# Altium PCB pcb.PcbDoc
Units mil, origin at the board's own origin, x right, y up, seen from the top; angles counter-clockwise.
Board outline 3051.18 x 787.4 mil, 2 copper layers (Top Layer, Bottom Layer); 39 components, 44 nets, 167 pads, 12 vias.
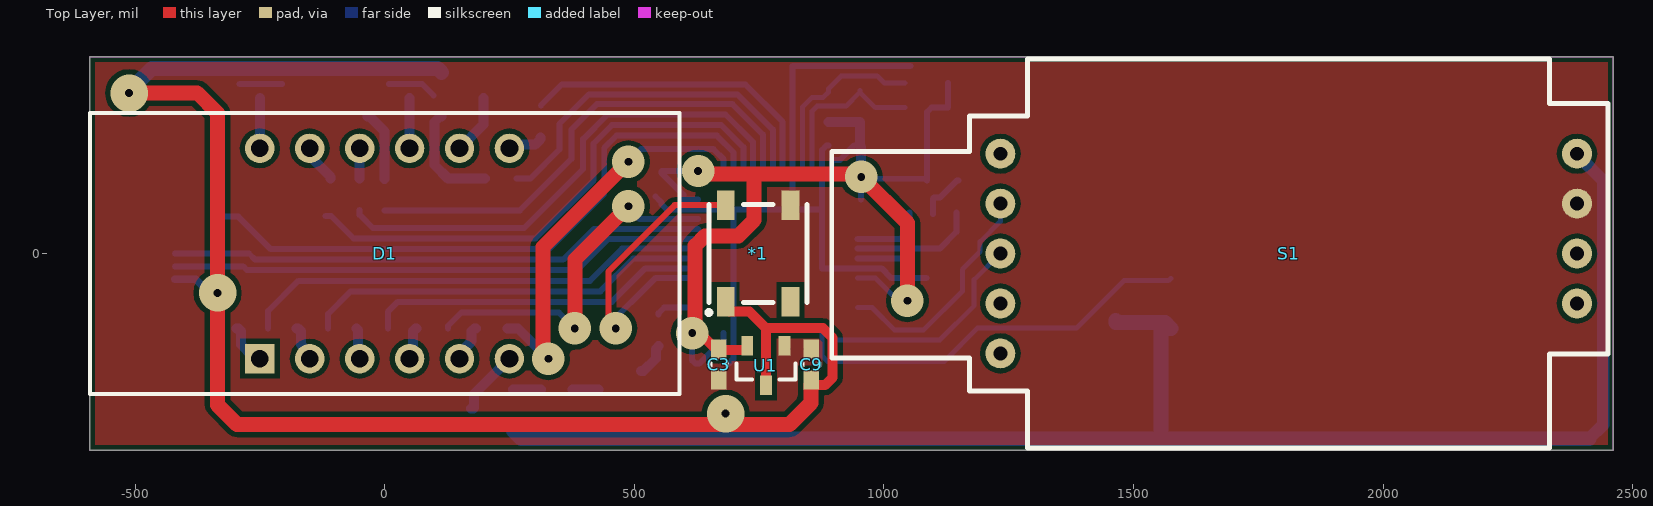
[diagram p0: Top Layer view]
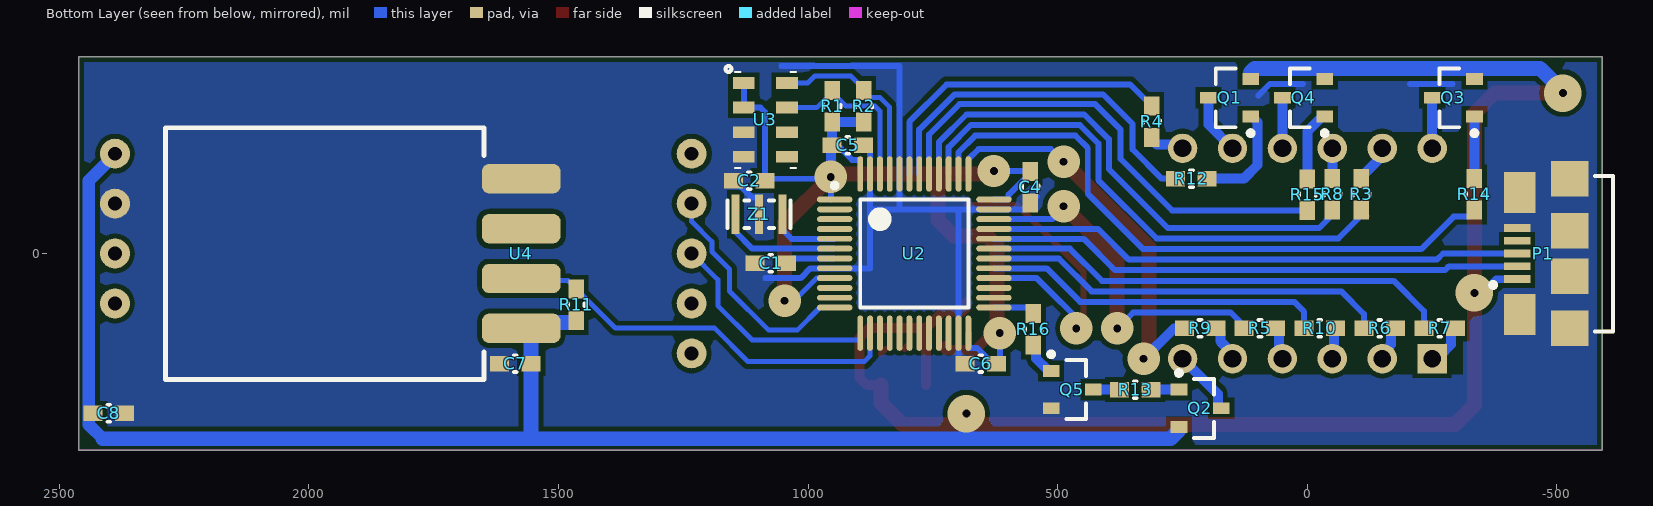
[diagram p1: Bottom Layer view, seen from below]
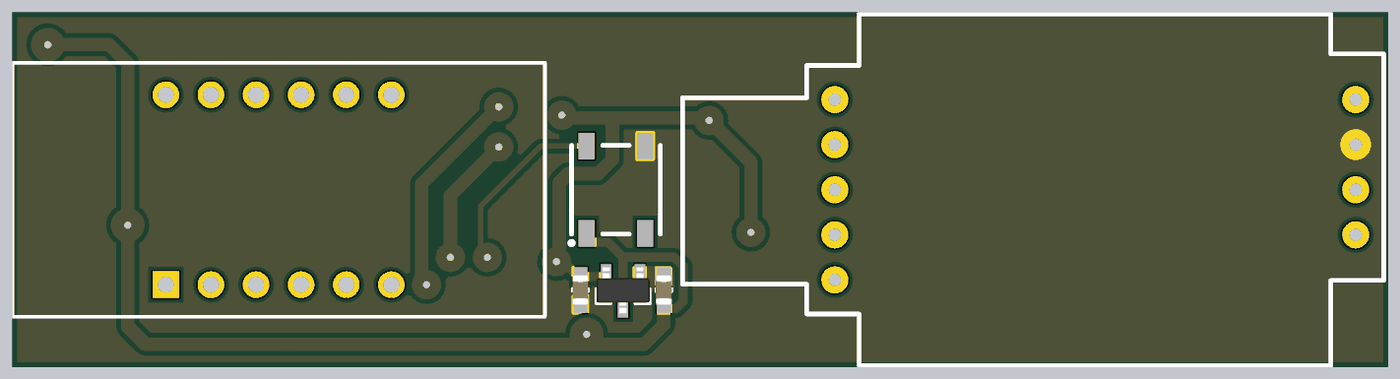
[diagram p2: 3D render of the assembled board from above, using the file's embedded part models]
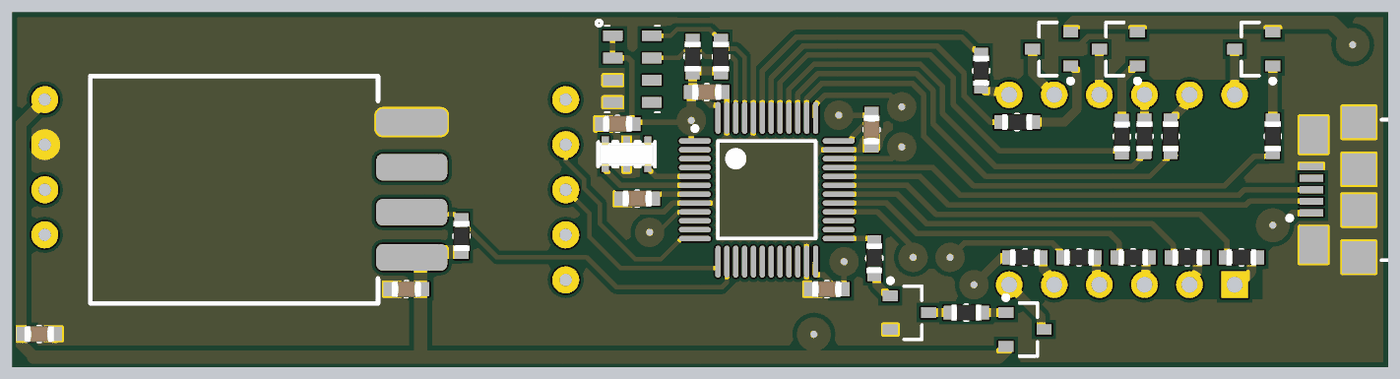
[diagram p3: 3D render of the assembled board from below, using the file's embedded part models]

## Layer stack, top to bottom
Top Solder: solder mask 0.4, Solder Resist, Dk 3.5
Top Layer: signal copper 1.4
Dielectric 1: dielectric 12.6, FR-4, Dk 4.8
Bottom Layer: signal copper 1.4
Bottom Solder: solder mask 0.4, Solder Resist, Dk 3.5

## Board outline
-590.55,-393.7 -590.55,393.7 2460.63,393.7 2460.63,-393.7

## Design rules (kind name [scope] priority, off if disabled: settings)
Clearance [All] p1: gap=5 ignorepadtopadclearanceinfootprint=FALSE except(10: Arc-Fill Arc-Poly Arc-Region Track-Fill Track-Poly Track-Region SMDPad-Fill SMDPad-Poly SMDPad-Region THPad-Fill THPad-Poly THPad-Region Via-Fill Via-Poly Via-Region Fill-Fill Fill-Poly Fill-Region Poly-Poly Poly-Region Region-Region)
MinimumSolderMaskSliver [All] p1 off: minsoldermaskwidth=10
PolygonConnect [All] p1: connectstyle=Direct reliefconductorwidth=10 reliefentries=4 polygonreliefangle="90 Angle" airgapwidth=10
RoutingVias [All] p1: holewidth=28 width=50 viastyle="Through Hole" minholewidth=15.75 minwidth=39.37 maxholewidth=28 maxwidth=196.85
SilkToSolderMaskClearance [IsPad] p1 off: minsilkscreentomaskgap=10 clearancetoexposedcopper=TRUE
SolderMaskExpansion [All] p1: expansion=4
Width [All] p1: maxlimit=500 minlimit=7.5 preferedwidth=10
28 further rules are at their usual default settings.

## Components (designator, comment, footprint, x,y, rotation, side; value= is the part's Value field where it differs from the comment)
*1 "LED_WS2812B" LED_WS2812b 748.03,0 r90 top
C1 "100nF" RC_0603 1074.8,-19.68 r180 bottom
C2 "100nF" RC_0603 1118.11,146.06 r180 bottom
C3 "100nF" RC_0603 669.29,-222.28 r90 top
C4 "100nF" RC_0603 555.12,133.18 r90 bottom
C5 "100nF" RC_0603 920.58,216.54 r0 bottom
C6 "100nF" RC_0603 654.22,-220.47 r180 bottom
C7 "100nF" RC_0603 1586.61,-220.47 r180 bottom
C8 "100nF" RC_0603 2401,-320 r0 bottom
C9 "100nF" RC_0603 854.33,-222.28 r270 top
D1 "7SEGx4" 7SEG_4X_MEDIUM 0,0 r0 top
P1 "USB" RR_USB_MICRO_#1 -393.7,0 r180 bottom
Q1 "PNP" SOT-23B_L 156,312 r0 bottom
Q2 "PNP" SOT-23B_L 215,-310.04 r180 bottom
Q3 "PNP" SOT-23B_L -292.32,312 r0 bottom
Q4 "PNP" SOT-23B_L 7.68,312 r0 bottom
Q5 "NPN_SOT23" SOT-23B_L 471,-272.64 r180 bottom
R1 "2k2" RR_0603 952.08,295.28 r270 bottom
R2 "2k2" RR_0603 889.08,295.28 r270 bottom
R3 "220" RR_0603 -108,118.5 r90 bottom
R4 "220" RR_0603 312,264 r270 bottom
R5 "220" RR_0603 95,-150 r180 bottom
R6 "220" RR_0603 -145,-150 r180 bottom
R7 "220" RR_0603 -265,-150 r180 bottom
R8 "220" RR_0603 -50,118.5 r90 bottom
R9 "220" RR_0603 215,-150 r180 bottom
R10 "220" RR_0603 -25,-150 r180 bottom
R11 "2k2" RR_0603 1464.57,-102.76 r270 bottom
R12 "1k" RR_0603 232.28,150 r180 bottom
R13 "1k" RR_0603 345,-272.64 r180 bottom
R14 "1k" RR_0603 -334.65,118.5 r90 bottom
R15 "1k" RR_0603 0,118.11 r90 bottom
R16 "1k" RR_0603 549,-152 r270 bottom
S1 "MH-Z19B" MH_Z19B 1811.02,0 r180 top locked
U1 "3V3_STAB" RR_SOT-23 763.78,-224.41 r270 top value="MOSFET N-CH 20V 4.2A SOT-23-3"
U2 "STM32F302C8T6" LQFP48_N 787.4,0 r180 bottom
U3 "Pressure Sensor" MS5611-01BA03 1085.63,267.72 r180 bottom
U4 "DHT11" DHT11 1968.5,0 r0 bottom
Z1 "8MHz" RR_CRYSTAL_3.2X1.3 1098.43,78.74 r180 bottom value="CER RES 8.0000MHZ 33PF SMD"

## Footprints (in the part's own frame and the unit in brackets; to place one, negate y for a bottom-side part, rotate by r counter-clockwise, add the part's x,y. Pads: shape width x height; smd on the part's side, far side on the other; paste and mask are expansions set on the pad)
7SEG_4X_MEDIUM [mm] "LED, 7-Segment Display, 9.2 mm, Dual Digit; 10 Leads; Row Space 10.7 mm; Pitch 2.54 mm"
  rect 1.5x1.5 hole 0.9: 1(-6.35,-5.35)
  round 1.5 hole 0.9: 2(-3.81,-5.35) 3(-1.27,-5.35) 4(1.27,-5.35) 5(3.81,-5.35) 6(6.35,-5.35) 7(6.35,5.35) 8(3.81,5.35) 9(1.27,5.35) 10(-1.27,5.35) 11(-3.81,5.35) 12(-6.35,5.35)
  silkscreen extent -15,-7.15 15,7.15, body extent -15,-7.15 15,7.15, height 7.1
DHT11 [mm]
  rrect50% 4x1.5 smd: 1(-10,3.81) 2(-10,1.27) 3(-10,-1.27) 4(-10,-3.81)
  silkscreen extent -8.1,-6.4 8.1,6.4, body extent -8.1,-6.4 8.1,6.4, height 6.1
LED_WS2812b [mm]
  rect 1.5x0.9 smd: 1(-2.46,1.65) 2(-2.46,-1.65) 3(2.46,-1.65) 4(2.46,1.65)
  silkscreen extent -3.1,-2.5 2.5,2.6, body extent -2.5,-2.5 2.5,2.5, height 1.6
LQFP48_N [mm] "Thin QFP, 48-Leads, Body 7x7mm, Pitch 0.5mm, IPC Medium Density"
  oval 1.8x0.3 smd: 1(-4.05,2.75) 2(-4.05,2.25) 3(-4.05,1.75) 4(-4.05,1.25) 5(-4.05,0.75) 6(-4.05,0.25) 7(-4.05,-0.25) 8(-4.05,-0.75) 9(-4.05,-1.25) 10(-4.05,-1.75) 11(-4.05,-2.25) 12(-4.05,-2.75) 25(4.05,-2.75) 26(4.05,-2.25) 27(4.05,-1.75) 28(4.05,-1.25) 29(4.05,-0.75) 30(4.05,-0.25) 31(4.05,0.25) 32(4.05,0.75) 33(4.05,1.25) 34(4.05,1.75) 35(4.05,2.25) 36(4.05,2.75)
  oval 0.3x1.8 smd: 13(-2.75,-4.05) 14(-2.25,-4.05) 15(-1.75,-4.05) 16(-1.25,-4.05) 17(-0.75,-4.05) 18(-0.25,-4.05) 19(0.25,-4.05) 20(0.75,-4.05) 21(1.25,-4.05) 22(1.75,-4.05) 23(2.25,-4.05) 24(2.75,-4.05) 37(2.75,4.05) 38(2.25,4.05) 39(1.75,4.05) 40(1.25,4.05) 41(0.75,4.05) 42(0.25,4.05) 43(-0.25,4.05) 44(-0.75,4.05) 45(-1.25,4.05) 46(-1.75,4.05) 47(-2.25,4.05) 48(-2.75,4.05)
  silkscreen extent -4.18,-2.75 2.75,3.57, body extent -3.5,-3.5 3.5,3.5, height 1.6
MH_Z19B [mil]
  round 60 hole 27.56: 1(-577.56,100) 2(-577.56,0) 3(-577.56,-100) 4(-577.56,-200) 5(577.56,-200) 6(577.56,-100) 7(577.56,0) 8(577.56,100) 9(577.56,200)
  silkscreen extent -640,-390 915,390, body extent -524,-390 524,390, height 354
MS5611-01BA03 [mm] "MS5611-01BA03 Pressure Sensor"
  rect 1.1x0.6 smd mask+0.1: 1(-1.1,1.875) 2(-1.1,0.625) 3(-1.1,-0.625) 4(-1.1,-1.875) 5(1.1,-1.875) 6(1.1,-0.625) 7(1.1,0.625) 8(1.1,1.875)
  silkscreen extent -2.03,-2.44 1.55,2.74, body extent -1.5,-2.36 1.5,2.36, height 1.02
RC_0603 [mil] "Chip Capacitor"
  rect 38x31 smd: 1(-31.5,0) 2(31.5,0)
  silkscreen extent -3,-17 3,17, body extent -33,-18 33,18, height 35
RR_0603 [mil] "Chip Resistor; Body 1.6 x 0.8 mm (LxW typ)"
  rect 38x31 smd: 1(-31.5,0) 2(31.5,0)
  silkscreen extent -3,-17 3,17, body extent -33,-18 33,18, height 22
RR_CRYSTAL_3.2X1.3 [mm]
  rect 0.4x2 smd: 1(1.2,0) 2(0,0) 3(-1.2,0)
  silkscreen extent -1.6,-0.7 1.6,0.7, body extent -1.6,-0.65 1.6,0.65, height 0.7
RR_SOT-23 [mm] "SOT23, 3-Leads, Body 2.9x1.3mm, Pitch 0.95mm, Lead Span 2.3mm, IPC High Density"
  rect 1x0.6 smd: 1(-1,0.95) 2(-1,-0.95) 3(1,0)
  silkscreen extent -0.1,-1.5 0.7,1.5, body extent -1.33,-1.5 1.27,1.5, height 1.1
RR_USB_MICRO_#1 [mm] "Connector; USB2.0, Type B, SM; 5 Position; Right Angle"
  rect 1.35x0.4 smd: 1(0.675,-1.3) 2(0.675,-0.65) 3(0.675,0) 4(0.675,0.65) 5(0.675,1.3)
  rect 1.6x2.1 smd: 6(0.8,-3.1) 6(0.8,3.1)
  rect 1.9x1.8 smd: 6(3.35,-3.8) 6(3.35,-1.15) 6(3.35,1.15) 6(3.35,3.8)
  silkscreen extent -0.68,-3.98 5.55,3.95, body extent 0.1,-3.95 5.55,3.95, height 3.9
SOT-23B_L [mm] "SOT23, 3-Leads, Body 2.9x1.3mm, Pitch 0.95mm, Lead Span 2.4mm, IPC High Density"
  rect 0.85x0.6 smd: 1(-1.075,0.95) 2(-1.075,-0.95) 3(1.075,0)
  silkscreen extent -1.2,-1.5 0.7,1.92, body extent -0.7,-1.5 0.7,1.5, height 1.14

## Part data
C1 C2 C3 C4 C5 C6 C7 C8 C9: library part Cap, "Capacitor"
P1: library part "Header 6", "Header, 6-Pin", LatestRevisionDate=17-Jul-2002, LatestRevisionNote="Re-released for DXP Platform.", Publisher="Altium Limited"
Q1 Q2 Q3 Q4: library part PNP_SOT23, "PNP Bipolar Transistor", LatestRevisionDate=29-May-2009, LatestRevisionNote="IPC-7351 Footprint Added.", PackageDescription="3-Pin SOT-23 Package 0.95 mm Pitch, 2.4 mm Lead Span", PackageReference=SOT-23B, PackageVersion=Aug-1999, Published=8-Jun-2000, Publisher="Altium Limited"
Q5: "NPN Bipolar Transistor", Code_JEDEC=TO-226-AA, LatestRevisionDate=17-Jul-2002, LatestRevisionNote="Re-released for DXP Platform.", PackageDescription="TO, Flat Index; 3 In-Line, Axial Leads; Body Dia. 4.8mm; Leads 0.55 x 0.51 mm (max)", PackageReference=TO-226-AA, Published=8-Jun-2000, Publisher="Altium Limited"
R1 R2 R3 R4 R5 R6 R7 R8 R9 R10 R11 R12 R13 R14 R15 R16: library part Res1, "Resistor"
S1: library part MH_Z19B
U1: library part IRLML2502, "MOSFET N-CH 20V 4.2A SOT-23-3", Manufacturer="Infineon Technologies", Package=SOT-23, Cost=0,52, Order Number="IRLML2502GTRPBF ( IRLML6246TRPBF (INFIN))"
U3: library part MS5611-01BA03, "Pressure Sensor - MS5611-01BA03"
Z1: library part CSTCE8M00G55-R0, "XTAL 8.0000MHZ 33PF SMD", Manufacturer="Murata Electronics", Package="3-SMD 3,2mm x 1,3mm", Cost=0,48, Order Number=CSTCE8M00G55-R0
U2: ComponentLink1Description="Manufacturer Link", ComponentLink1URL=www.st.com/stm32, ComponentLink2Description=Datasheet, ComponentLink2URL=http://www.st.com/stonline/products/literature/ds/13587.pdf, DatasheetVersion="rev6, Mar-2008", PackageDescription="48-Pin Low-Profile Quad Flat Pack, 7 x 7 mm Body, 0.5 mm Pitch (LQFP48)", PackageReference=LQFP48, PackageVersion=Mar-2008, Published=30-May-2008, Publisher="Altium Limited"

## Via types
v1: diameter 65, hole 15.75, Top Layer to Bottom Layer, tented both sides, 9 vias
v2: diameter 75, hole 15.75, Top Layer to Bottom Layer, tented both sides, 3 vias

## Nets (pads, with @x,y where several pads share a name; then routed paths per layer and width w, separated by ;. In a path a pad name is that pad's centre, name@x,y a point inside that pad or via, vN(x,y) a via of type N, cw(c..) or ccw(c..) an arc to the next point about the centre after c; other vN are vias at no path point)
3V3: C2.2 C3.2 C4.2 C5.2 C6.2 R1.2 R2.2 U1.2 U2.1 U2.9 U2.24 U2.36 U2.48 U3.1 U3.2 | length 2308.4
  Top Layer w20: v1(616.14,-159.45) 624.75,-168.06 640.07,-168.06 669.29,-197.28 C3.2@669.29,-198.41 ; C3.2@669.29,-200.78 C3.2@669.29,-198.41 ; U1.2 726.38,-191.1 724.57,-192.91 674.79,-192.91 C3.2@669.29,-198.41
  Top Layer w30: v1(616.14,-159.45) 622.05,-153.54 622.05,15.75 641.73,35.43 708.66,35.43 740.16,66.93 740.16,159.45 ; v1(627.95,165.35) 633.86,159.45 740.16,159.45 ; v1(1047.24,-94.49) 1047.24,61.02 v1(954.72,153.54) 948.82,159.45 740.16,159.45
  Bottom Layer w10: U2.9 983.21,-49.21 1028.49,-94.49 v1(1047.24,-94.49)
  Bottom Layer w12: v1(616.14,-159.45) 616.14,-213.89 C6.2 630.2,-220.47 661.88,-188.79 679.13,-188.79 U2.24 ; U2.36 598.61,108.27 598.52,108.36 598.52,117.78 555.12,161.18 C4.2 555.8,165.35 v1(627.95,165.35) ; U2.48 895.67,187.63 895.76,187.72 912.13,187.72 940.94,216.54 C5.2 C5.2@954.72,213.89 ; U2.1@954.72,108.27 v1(954.72,153.54) 958.46,149.8 1082.87,149.8 C2.2 1086.61,283.46 1095.47,292.32 U3.2 U3.1
  Bottom Layer w20: R2.2 R1.2 C5.2 ; v1(954.72,153.54) C5.2@954.72,213.89
5V: *1.1 C7.2 C8.2 C9.2 P1.1 Q1.2 Q2.2 Q3.2 Q4.2 R11.2 S1.4 U1.3 U4.1 | length 6442.7
  Top Layer w20: *1.1 683.07,-108.66 690.79,-116.38 730.55,-116.38 763.78,-149.61 ; U1.3 763.78,-149.61 ; C9.2@854.33,-263.78 881.89,-263.78 897.64,-248.03 897.64,-169.29 877.95,-149.61 763.78,-149.61
  Top Layer w30: v2@-511.81,322 -375.56,322 -334.65,281.09 v2(-334.65,-78.74) -334.65,-303.35 -295.48,-342.52 811.02,-342.52 854.33,-299.21 C9.2@854.33,-263.78
  Bottom Layer w15: P1.1 -378.44,-51.18 -350.88,-78.74 v2(-334.65,-78.74)
  Bottom Layer w25: S1.4@2388.58,198.66 2440.94,146.3 2440.94,-343.06 2413,-371
  Bottom Layer w30: v2@-505,332 -466,371 -287.4,371 -34.65,371 106,371 114,363 ; Q2.2@258,-355 274,-371 683.07,-371 ; v2(683.07,-320.52) 683.07,-371 ; R11.2 1464.57,-137.76 1465.07,-138.26 1563.06,-138.26 U4.1 1555.11,-150 C7.2 1555.11,-371 ; S1.4@2388.58,198.66 S1.4 ; 2413,-371 1555.11,-371 ; 683.07,-371 1555.11,-371
  other v2: -511.81,321.46
A: R3.1 U2.39 | length 1064.9
  Bottom Layer w12: R3.1@-118.5,75.19 -107.19,75.19 -62.02,30.02 301.92,30.02 418.8,146.9 418.8,220.38 455.8,257.38 674.12,257.38 718.5,213 U2.39
A1: R14.1 U2.38 | length 1273
  Bottom Layer w12: R14.1 -334.65,83.5 -325.15,74 -293,74 -227.86,8.86 328.94,8.86 439.96,119.88 439.96,211.61 464.57,236.22 665.35,236.22 698.82,202.76 U2.38
A2: R15.1 U2.41 | length 984.3
  Bottom Layer w12: R15.1 271.26,86.61 374.02,189.37 374.02,248.03 425.2,299.21 696.85,299.21 757.87,238.19 U2.41
A3: R12.1 U2.42 | length 731.7
  Bottom Layer w12: R12.1 291.73,150 350.39,208.66 350.39,259.84 409.45,318.9 706.69,318.9 777.56,248.03 U2.42
A4: R16.1 U2.25 | length 86.9
  Bottom Layer w12: R16.1@549,-122.5 549,-119 559.73,-108.27 U2.25
B: R4.1 U2.43 | length 637
  Bottom Layer w12: R4.1@313,296.5 355.08,338.58 722.44,338.58 797.24,263.78 U2.43
C: R5.1 U2.34 | length 719
  Top Layer w30: v1(381,-150) 381,-12.33 v1(488.19,94.86)
  Bottom Layer w12: R5.1 126.5,-145.15 153.54,-118.11 349.11,-118.11 v1(381,-150) ; v1@488.19,83.86 495.6,83.86 510.56,68.9 U2.34
D: R6.1 U2.30 | length 816.3
  Bottom Layer w12: R6.1 -113.5,-121.37 -67.91,-75.79 432.09,-75.79 498.03,-9.84 U2.30
DHT: R11.1 U2.14 U4.2 | length 818.1
  Bottom Layer w10: U2.14 875.98,-204.88 887.64,-216.54 1120.44,-216.54 1187.37,-149.61 1385.83,-149.61 1481.06,-54.37 1570.43,-54.37 U4.2
DM: P1.2 U2.32 | length 1077.6
  Bottom Layer w12: P1.2 -283.46,-25.59 -275.59,-33.46 385.33,-33.46 448.33,29.53 U2.32
DOT: R10.1 U2.29 | length 690.8
  Bottom Layer w12: R10.1 6.5,-116.76 26.31,-96.95 455.03,-96.95 522.45,-29.53 U2.29
DP: P1.3 U2.33 | length 1078.8
  Bottom Layer w12: P1.3 -271.65,0 -259.35,-12.3 357.78,-12.3 419.29,49.21 U2.33
E: R7.1 U2.31 | length 947.9
  Bottom Layer w12: R7.1 -233.5,-115.39 -172.74,-54.63 411.32,-54.63 475.79,9.84 U2.31
F: R8.1 U2.40 | length 1024.5
  Bottom Layer w12: R8.1 -50,77.56 -23.62,51.18 279.53,51.18 397.64,169.29 397.64,229.14 447.04,278.54 682.89,278.54 738.19,223.24 U2.40
G: R9.1 U2.37 | length 816.1
  Top Layer w30: v1(328,-210.63) 317,-199.63 317,12.67 v1(488.19,183.86)
  Bottom Layer w12: v1(488.19,183.86) 513.83,209.5 658.42,209.5 679.13,188.79 U2.37
  Bottom Layer w20: R9.1 267.37,-150 v1(328,-210.63)
GND: *1.3 C1.1 C2.1 C3.1 C4.1 C5.1 C6.1 C7.1 C8.1 C9.1 P1.5 P1.6 Q5.2 S1.3 U1.1 U2.8 U2.23 U2.35 U2.44 U2.47 U3.3 U3.4 U4.4 Z1.2 | length 1959.9
  Top Layer w12: U1.1 U1.1@806.99,-190.85 ; C9.1@844.83,-190.85 854.33,-200.35 C9.1@854.33,-200.78
  Bottom Layer w12: -291,340 -206,340 ; 9,340 75,340 98,317 ; C4.1@542.62,114.17 C4.1 555.12,98.18 564.62,88.68 627.95,88.68 U2.35 698.82,88.58 ; C6.1 689.22,-220.47 698.72,-210.97 698.72,-159.54 U2.23 698.82,88.58 ; C5.1 885.58,216.54 876.08,207.04 876.08,159.54 U2.47 875.98,88.58 ; 1053,376 816.93,376 U2.44 816.93,88.58 ; 1085,-49.21 1015.21,-49.21 995.62,-29.62 946.94,-29.62 U2.8 875.98,-29.53 875.98,88.58 ; Z1.2 1098.43,110.24 1100.3,112.11 1112.16,112.11 1146.11,146.06 C2.1 ; 698.82,88.58 816.93,88.58 ; 816.93,88.58 875.98,88.58
LED_SERIAL: *1.4 U2.28 | length 617.2
  Top Layer w12: v1@448,-135.07 448,-36.25 581.1,96.85 *1.4
  Bottom Layer w12: v1@441.54,-150 542.32,-49.21 U2.28
  other v1: 463.07,-150
NetC1_2: C1.2 U2.7 | length 100.5
  Bottom Layer w12: U2.7 1033.46,-9.84 C1.2
NetD1_1: D1.1 R7.2 | length 70.1
  Bottom Layer w20: R7.2 -293,-150 -287.5,-155.5 -287.5,-182.5 D1.1@-265,-205
NetD1_2: D1.2 R6.2 | length 73.7
  Bottom Layer w20: R6.2 -173,-150 -167.5,-155.5 -167.5,-182.56 -150,-200.06 D1.2
NetD1_3: D1.3 R10.2 | length 63.3
  Bottom Layer w20: R10.2 -53.25,-153.25 -53.25,-207.38 D1.3
NetD1_4: D1.4 R5.2 | length 67
  Bottom Layer w20: D1.4 56.75,-203.88 56.75,-155.5 62.25,-150 R5.2
NetD1_5: D1.5 R9.2 | length 76.6
  Bottom Layer w20: D1.5 150,-200.06 174.5,-175.56 174.5,-155.5 180,-150 R9.2
NetD1_6: D1.6 Q2.3 | length 134.3
  Bottom Layer w20: Q2.3 177.6,-310.04 179.41,-308.23 179.41,-281.22 D1.6
NetD1_7: D1.7 R4.2 | length 73.1
  Bottom Layer w20: D1.7 257.47,218.1 301.1,218.1 312,229 R4.2
NetD1_8: D1.8 Q1.3 | length 121.4
  Bottom Layer w20: D1.8 198.32,258.95 Q1.3
NetD1_9: D1.9 Q4.3 | length 101.4
  Bottom Layer w20: D1.9 Q4.3
NetD1_10: D1.10 R8.2 | length 60.6
  Bottom Layer w20: R8.2 D1.10
NetD1_11: D1.11 R3.2 | length 78
  Bottom Layer w20: D1.11 -142.53,203.16 -142.53,188.03 -108,153.5 R3.2
NetD1_12: D1.12 Q3.3 | length 101.4
  Bottom Layer w20: D1.12 Q3.3
NetQ1_1: Q1.1 R12.2 | length 216.5
  Bottom Layer w20: Q1.1 111,274.6 100,263.6 100,177.45 127.45,150 R12.2
NetQ2_1: Q2.1 R13.2 | length 56.2
  Bottom Layer w20: Q2.1 R13.2
NetQ3_1: Q3.1 R14.2 | length 124.6
  Bottom Layer w20: R14.2 Q3.1
NetQ4_1: Q4.1 R15.2 | length 142.2
  Bottom Layer w20: Q4.1 -29.72,274.6 0,244.87 R15.2
NetQ5_1: Q5.1 R16.2 | length 67.4
  Bottom Layer w20: Q5.1 518.24,-235.24 543.5,-209.98 543.5,-191 R16.2@549,-185.5
NetQ5_3: Q5.3 R13.1 | length 52.2
  Bottom Layer w20: R13.1 Q5.3
NetU2_5: U2.5 Z1.1 | length 147.1
  Bottom Layer w12: U2.5 1033.46,29.53 1051.18,47.24 Z1.1 Z1.1@1051.18,82.68
NetU2_6: U2.6 Z1.3 | length 252.1
  Bottom Layer w12: U2.6 1112.2,9.84 1145.67,43.31 Z1.3 Z1.3@1145.67,82.68
RX: S1.6 U2.12 | length 468.5
  Bottom Layer w10: U2.12 976.38,-108.27 1021.65,-153.54 1079.18,-153.54 1157.48,-75.24 1157.48,-31.5 1192.91,3.94 1192.91,23.62 1233.46,64.17 S1.6
SCL: R2.1 U2.45 U3.8 | length 375.3
  Bottom Layer w10: U2.45 836.61,293.09 856.3,312.78 878.58,312.78 889.08,323.28 R2.1 889.08,330.28 914.58,355.78 986.74,355.78 1000.98,341.54 U3.8
SDA: R1.1 U2.46 U3.7 | length 344
  Bottom Layer w10: U2.46 856.3,285.43 866.14,295.28 924.08,295.28 R1.1@952.08,323.28 ; R1.1 R1.1@952.08,323.28 ; U3.7 983.03,292.32 R1.1@952.08,323.28
TX: S1.7 U2.13 | length 453.8
  Bottom Layer w10: U2.13 895.67,-173.23 1112.2,-173.23 1181.1,-104.33 1181.1,-52.36 S1.7
pads on no net: *1.2 P1.4 S1.1 S1.2 S1.5 S1.8 S1.9 U2.2 U2.3 U2.4 U2.10 U2.11 U2.15 U2.16 U2.17 U2.18 U2.19 U2.20 U2.21 U2.22 U2.26 U2.27 U3.5 U3.6 U4.3

## Polygon pours and split planes (outlines as drawn)
GND on Top Layer "Top Layer-GND" (solid, remove dead copper, pour order 0): -590.55,393.7 -590.55,-393.7 2460.63,-393.7 2460.63,393.7
GND on Bottom Layer "Bottom Layer-GND" (solid, remove dead copper, pour order 2): -590.55,393.7 -590.55,-393.7 2460.63,-393.7 2460.63,393.7

## Keep-outs
Keep-Out Layer:
  the board outline again, w1

## Other copper
Bottom Layer:
  pour cut-out: -310,-177.26 287,-177.26 287,-242.95 -312,-242.95 -312,-176.26
  pour cut-out: -310,244 287,244 287,178.31 -312,178.31 -312,245

## Text inside footprints (layer, text, board x,y; h text height)
P1: Mechanical 1 "PCB Edge" at -599.41,-145.67 h9.84 r270